# Altium PCB PCBV0.1_2020-06-08_12-09-47.pcbdoc
Units mm, origin at the board's own origin, x right, y up, seen from the top; angles counter-clockwise.
Board outline 146.19 x 149.41 mm, 2 copper layers (Top Layer, Bottom Layer); 7 components, 4 nets, 170 pads, 18 vias.
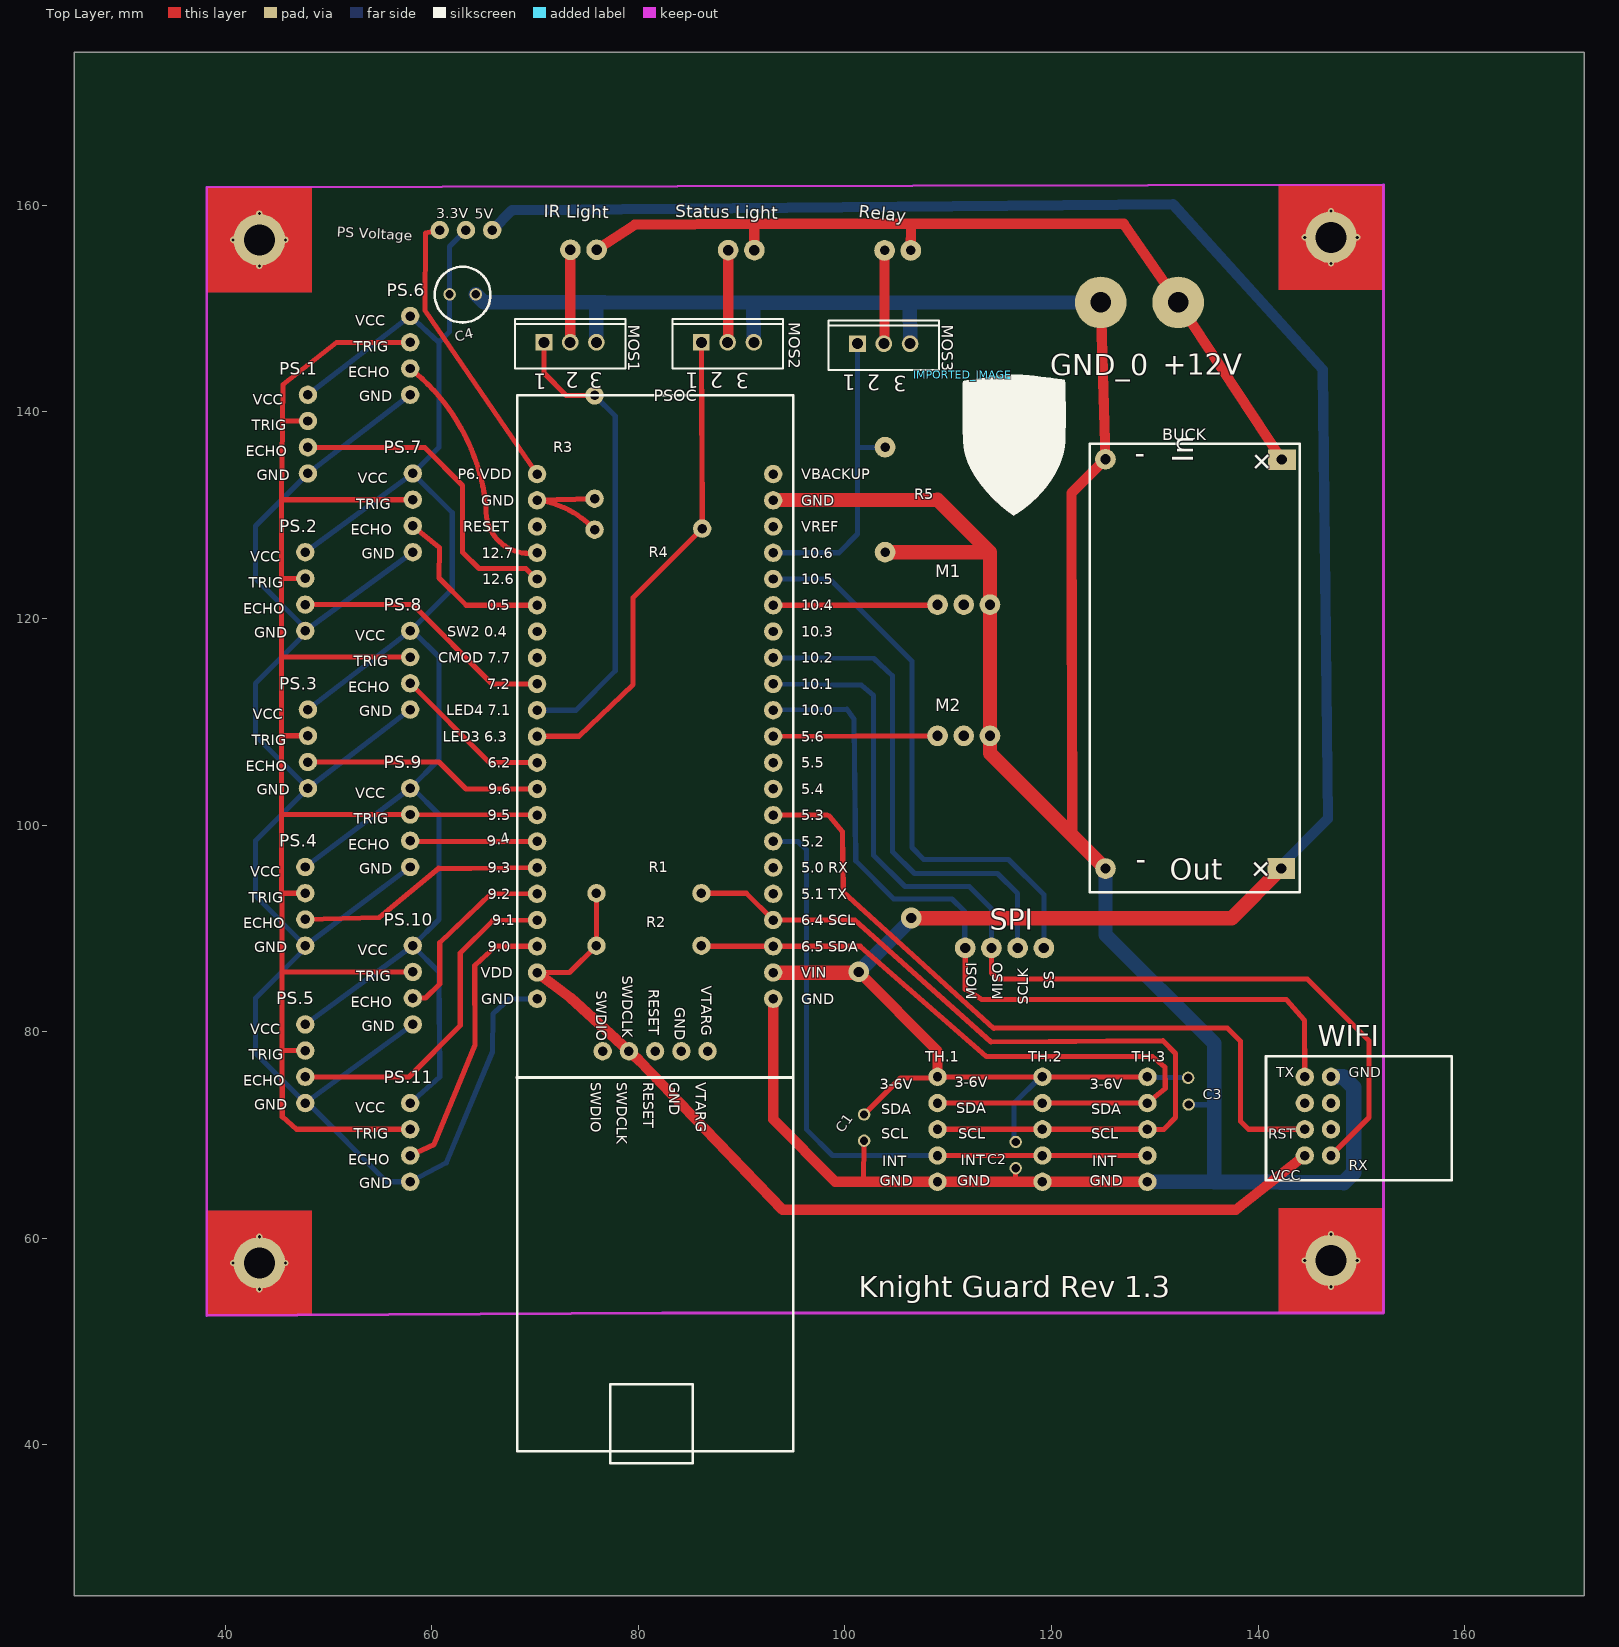
[diagram p0: Top Layer view]
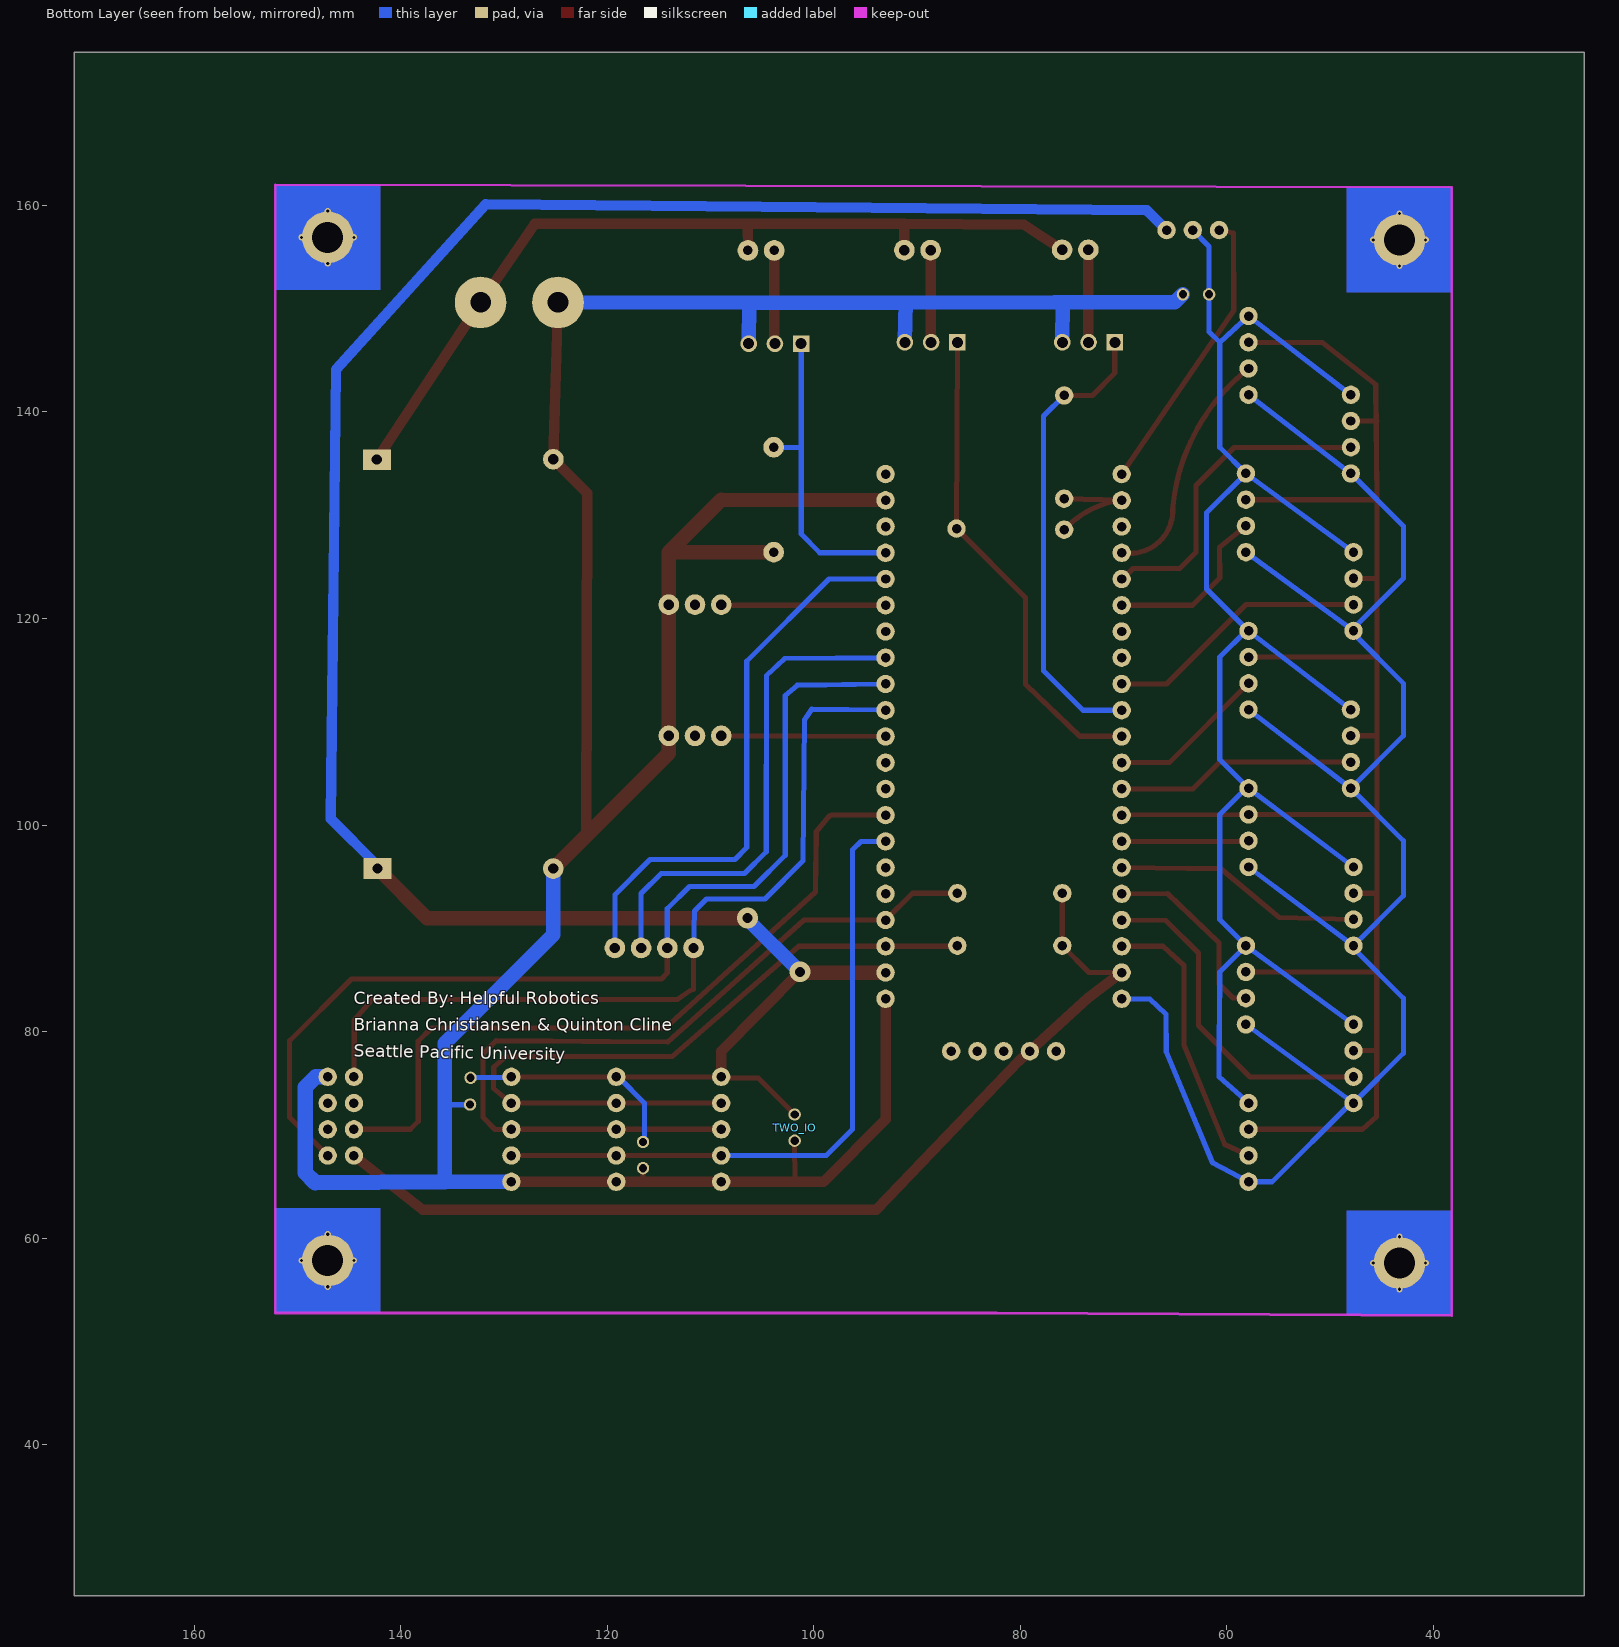
[diagram p1: Bottom Layer view, seen from below]

## Layer stack, top to bottom
Top Layer: signal copper (thickness not stored)
Dielectric: dielectric 0.32, FR-4, Dk 4.8
Bottom Layer: signal copper (thickness not stored)

## Board outline
171.593,25.4 25.4,25.4 25.4,174.812 171.593,174.812

## Components (designator, comment, footprint, x,y, rotation, side; value= is the part's Value field where it differs from the comment)
BUCK "LM2596-MODULE" LM2596-MODULE 133.766,115.605 r270 top
IMPORTED_IMAGE "IMPORTED_IMAGE" IMPORTED_IMAGE 111.402,143.617 r0 top
MOS1 "TO-220AB" TO-220AB 73.406,146.745 r270 top
MOS2 "TO-220AB" TO-220AB 88.646,146.745 r270 top
MOS3 "TO-220AB" TO-220AB 103.766,146.605 r270 top
PSOC "CY8CPROTO-063-BLE" CY8CPROTO-063-BLE 68.266,141.605 r0 top
TWO_IO "TWO_IO" TWO_IO 97.58,71.51 r90 bottom

## Footprints (in the part's own frame and the unit in brackets; to place one, negate y for a bottom-side part, rotate by r counter-clockwise, add the part's x,y. Pads: shape width x height; smd on the part's side, far side on the other; paste and mask are expansions set on the pad)
CY8CPROTO-063-BLE [mil]
  round 70 hole 36: 1(75.98,-300) 2(75.98,-400) 3(75.98,-500) 4(75.98,-600) 5(75.98,-700) 6(75.98,-800) 7(75.98,-900) 8(75.98,-1000) 9(75.98,-1100) 10(75.98,-1200) 11(75.98,-1300) 12(75.98,-1400) 13(75.98,-1500) 14(75.98,-1600) 15(75.98,-1700) 16(75.98,-1800) 17(75.98,-1900) 18(75.98,-2000) 19(75.98,-2100) 20(75.98,-2200) 21(75.98,-2300) 22(975.98,-300) 23(975.99,-400) 24(975.99,-500) 25(975.99,-600) 26(975.99,-700) 27(975.99,-800) 28(975.99,-900) 29(975.99,-1000) 30(975.99,-1100) 31(975.99,-1200) 32(975.99,-1300) 33(975.99,-1400) 34(975.99,-1500) 35(975.99,-1600) 36(975.99,-1700) 37(975.99,-1800) 38(975.99,-1900) 39(975.99,-2000) 40(975.99,-2100) 41(975.99,-2200) 42(975.99,-2300) 43(325.98,-2500) 44(425.98,-2500) 45(525.98,-2500) 46(625.98,-2500) 47(725.98,-2500)
  silkscreen extent -1,-4070 1052,0
IMPORTED_IMAGE [mm]
  silkscreen extent -0.01,-13.64 9.96,0
LM2596-MODULE [mm]
  rect 2x2.7 hole 1: 1(-19.784,8.54) 3(19.814,8.481)
  round 2 hole 1: 2(-19.815,-8.54) 4(19.815,-8.535)
  silkscreen extent -21.33,-10.06 22.1,10.26
TO-220AB [mil]
  rect 63.5x63.5 hole 42: 1(0,-100)
  round 63.5 hole 42: 2(0,0) 3(0,100)
  silkscreen extent -89,-211 100,211
TWO_IO [mm]
  round 1.199 hole 0.798: P$1(0.47,4.28) P$2(-2.07,4.28)

## Free pads (board coordinates)
  round 1.778 hole 0.914: 1(47.752,80.705) 1(47.752,95.945) 1(47.752,126.425) 1(48.006,111.185) 1(48.006,141.665) 1(57.912,73.085) 1(57.912,103.565) 1(57.912,118.805) 1(57.912,149.285) 1(58.166,88.325) 1(58.166,134.045) 1(60.766,157.605) 1(63.306,157.605) 1(65.846,157.605) 1(108.966,73.085) 1(108.966,75.625) 1(119.126,73.085) 1(119.126,75.625) 1(129.286,73.085) 1(129.286,75.625) 2(47.752,78.165) 2(47.752,93.405) 2(47.752,123.885) 2(48.006,108.645) 2(48.006,139.125) 2(57.912,70.545) 2(57.912,101.025) 2(57.912,116.265) 2(57.912,146.745) 2(58.166,85.785) 2(58.166,131.505) 2(108.966,70.545) 2(119.126,70.545) 2(129.286,70.545) 3(47.752,75.625) 3(47.752,90.865) 3(47.752,121.345) 3(48.006,106.105) 3(48.006,136.585) 3(57.912,68.005) 3(57.912,98.485) 3(57.912,113.725) 3(57.912,144.205) 3(58.166,83.245) 3(58.166,128.965) 3(108.966,68.005) 3(119.126,68.005) 3(129.286,68.005) 4(47.752,73.085) 4(47.752,88.325) 4(47.752,118.805) 4(48.006,103.565) 4(48.006,134.045) 4(57.912,65.465) 4(57.912,95.945) 4(57.912,111.185) 4(57.912,141.665) 4(58.166,80.705) 4(58.166,126.425) 4(108.966,65.465) 4(119.126,65.465) 4(129.286,65.465) 39(144.526,68.005) 39(144.526,70.545) 39(144.526,73.085) 39(144.526,75.625) 39(147.066,68.005) 39(147.066,70.545) 39(147.066,73.085) 39(147.066,75.625) 40(75.766,128.605) 40(75.766,131.605) 40(75.766,141.605) 40(75.946,88.325) 40(75.946,93.405) 40(86.106,88.325) 40(86.106,93.405) 40(86.183,128.708)
  round 5 hole 2: 6(124.766,150.605) 7(132.266,150.605)
  round 5 hole 3: 9(43.306,57.605) 9(43.306,156.665) 9(147.066,57.845) 9(147.066,156.905)
  round 2 hole 1: 11(108.966,121.345) 12(111.506,108.645) 12(111.506,121.345) 12(114.046,121.345) 13(73.423,155.703) 13(88.697,155.669) 13(108.966,108.645) 14(75.963,155.703) 14(91.237,155.669) 14(114.046,108.645) 15(119.266,88.105) 16(116.726,88.105) 17(114.186,88.105) 18(111.646,88.105)
  round 2 hole 0.914: 41(103.839,155.635) 42(106.379,155.635) 43(103.886,136.585) 44(103.886,126.425)
  round 1.199 hole 0.798: P$1(64.269,151.385) P$1(116.539,69.322) P$1(133.237,75.531) P$2(61.729,151.385) P$2(116.539,66.782) P$2(133.284,72.944)

## Via types
v1: diameter 0.61, hole 0.305, Top Layer to Bottom Layer, 16 vias
v2: diameter 2, hole 1, Top Layer to Bottom Layer, 2 vias

## Nets (pads, with @x,y where several pads share a name; then routed paths per layer and width w, separated by ;. In a path a pad name is that pad's centre, name@x,y a point inside that pad or via, vN(x,y) a via of type N, cw(c..) or ccw(c..) an arc to the next point about the centre after c; other vN are vias at no path point)
S$1077: pad.3@47.752,75.625 PSOC.18 | length 32.8
  Top Layer w0.5: pad.3@47.752,75.625 57.785,75.625 62.766,80.606 62.766,87.606 65.907,90.747 PSOC.18
S$1080: pad.3@58.166,83.245 PSOC.16 PSOC.17 | length 18.5
  Top Layer w0.5: pad.3@58.166,83.245 59.406,83.245 60.767,84.604 60.767,88.604 65.766,93.38 PSOC.17
S$3766: BUCK.1 BUCK.2 BUCK.3 BUCK.4 MOS1.1 MOS1.2 MOS1.3 MOS2.1 MOS2.2 MOS2.3 MOS3.1 MOS3.2 MOS3.3 pad.1 pad.2 pad.3@47.752,90.865 pad.3@47.752,121.345 pad.3@48.006,106.105 pad.3@48.006,136.585 pad.3@57.912,68.005 pad.3@57.912,98.485 pad.3@57.912,113.725 pad.3@57.912,144.205 pad.3@58.166,128.965 pad.3@108.966,68.005 pad.3@119.126,68.005 pad.3@129.286,68.005 pad.4 pad.6 pad.7 pad.11 pad.12 pad.13 pad.14 pad.15 pad.16 pad.17 pad.18 pad.39 pad.40 pad.41 pad.42 pad.43 pad.44 pad.P$1 pad.P$2 PSOC.1 PSOC.2 PSOC.3 PSOC.4 PSOC.5 PSOC.6 PSOC.9 PSOC.10 PSOC.11 PSOC.12 PSOC.13 PSOC.14 PSOC.15 PSOC.20 PSOC.21 PSOC.23 PSOC.25 PSOC.26 PSOC.27 PSOC.29 PSOC.30 PSOC.31 PSOC.35 PSOC.36 PSOC.39 PSOC.40 PSOC.41 PSOC.42 PSOC.46 TWO_IO.P$1 TWO_IO.P$2 | length 2258.1
  Top Layer w0.254: pad.3@47.752,121.345 pad.3@48.006,121.091 ; pad.3@57.912,113.725 pad.3@58.166,113.471 ; PSOC.27 93.31,121.285 PSOC.27@93.37,121.345 ; 93.116,108.391 93.37,108.645
  Top Layer w0.5: 45.466,108.645 pad.2@48.006,108.645 ; 45.466,123.885 pad.2@47.752,123.885 ; 45.466,139.125 pad.2@48.006,139.125 ; 45.48,93.405 pad.2@47.752,93.405 ; pad.3@47.701,90.865 54.932,91.049 60.655,95.818 63.795,95.793 70.145,95.885 ; pad.2@47.752,78.165 45.494,78.165 ; pad.3@47.752,121.345 58.166,121.345 65.846,113.665 PSOC.9 ; pad.3@47.986,136.552 59.322,136.552 62.989,132.884 62.989,126.422 64.572,124.84 69.106,124.84 PSOC.5@70.14,123.806 ; pad.3@48.006,106.105 60.706,106.105 63.306,103.505 PSOC.13 ; pad.3@57.912,68.005 60.223,69.072 64.173,78.704 64.16,86.399 66.192,88.272 70.195,88.264 ; pad.2@57.912,70.545 46.921,70.545 45.517,71.764 45.494,78.165 ; pad.3@57.912,98.485 57.972,98.425 PSOC.15 ; pad.3@57.912,113.725 65.592,106.045 PSOC.12 ; pad.2@57.912,116.265 45.466,116.265 ; pad.2@57.912,146.745 50.775,146.72 45.593,142.668 45.466,131.505 ; pad.3@57.917,144.195 cw(c45.832,128.884) 65.267,130.542 ; pad.2@58.166,85.785 45.494,85.785 ; pad.3@58.166,128.965 60.74,126.875 60.706,123.918 63.34,121.284 PSOC.6 ; pad.2@58.166,131.505 45.466,131.505 ; pad.1@60.767,157.606 59.385,157.337 59.347,149.811 PSOC.1 ; 65.255,130.599 ccw(c69.406,130.46) PSOC.4@70.157,126.375 ; PSOC.20 73.346,85.725 75.946,88.325 pad.40@75.946,93.405 ; PSOC.14 57.912,101.025 45.466,101.025 ; PSOC.11@70.195,108.594 74.228,108.594 79.496,113.623 79.496,122.02 pad.40@86.183,128.707 ; PSOC.2 pad.40@75.766,131.604 ; PSOC.2@70.221,131.487 cw(c68.912,122.192) pad.40@75.766,128.605 ; MOS1.1 70.866,143.766 73.027,141.605 pad.40@75.766,141.605 ; pad.40@86.106,88.325 86.166,88.265 PSOC.40 ; pad.40@86.106,93.405 90.456,93.405 PSOC.39 ; MOS2.1 pad.40@86.183,128.708 ; PSOC.40 101.488,88.264 113.706,77.581 129.766,77.606 130.988,76.565 131.016,74.497 129.286,73.085 119.126,73.085 pad.1@108.966,73.085 ; PSOC.39 100.957,90.804 114.148,79.013 130.785,79.12 132.017,77.888 132.017,71.683 130.868,70.535 129.286,70.545 119.126,70.545 pad.2@108.966,70.545 ; PSOC.35 98.265,100.964 98.516,100.855 99.766,99.356 99.835,93.532 114.422,80.324 137.015,80.354 138.303,79.067 138.303,71.317 139.075,70.545 pad.39@144.526,70.545 ; 93.056,108.585 pad.13@108.966,108.645 ; PSOC.27 108.906,121.285 pad.11 ; 101.832,65.465 101.813,65.442 TWO_IO.P$2 ; TWO_IO.P$1@101.907,72.027 105.388,75.508 pad.1@109.057,75.508 ; pad.3@108.966,68.005 119.126,68.005 pad.3@129.286,68.005 ; pad.1@108.966,75.625 119.126,75.625 pad.1@129.286,75.625 ; pad.18 111.646,84.105 112.039,83.936 113.266,83.105 142.766,83.105 144.502,81.087 pad.39@144.526,75.625 ; pad.17 114.186,85.686 114.765,85.104 144.765,85.104 150.752,79.12 150.752,71.691 pad.39@147.066,68.005 ; 116.525,65.546 pad.P$2@116.525,66.722 ; 45.466,101.025 45.494,85.785 ; 45.466,101.025 45.466,116.265 ; 45.466,116.265 45.466,131.505 ; 45.494,78.165 45.494,85.785
  Top Layer w1: PSOC.20@70.221,85.699 73.431,83.286 ; 73.406,83.311 80.094,77.2 93.957,62.76 137.871,62.76 137.947,62.831 pad.39@144.526,68.005 ; MOS1.2 73.423,146.762 pad.13@73.423,155.703 ; pad.14@75.963,155.703 79.66,158.134 91.532,158.209 ; MOS2.2 88.697,146.796 pad.13@88.697,155.669 ; pad.14@91.237,155.669 91.237,158.209 127.017,158.209 pad.7 BUCK.1 ; PSOC.42@93.048,83.184 93.048,71.505 99.057,65.465 pad.4@129.286,65.465 ; v2(101.346,85.785) 108.966,78.089 pad.1@108.966,75.625 ; MOS3.2@103.767,146.605 103.839,146.678 pad.41@103.839,155.635 ; pad.42 106.404,158.15 ; 122.022,98.801 121.933,132.115 BUCK.2 pad.6
  Top Layer w1.4: PSOC.41 101.286,85.725 v2(101.346,85.785) ; PSOC.23 108.966,131.505 114.046,126.425 ; pad.44 114.046,126.425 ; v2(106.426,90.999) 137.454,90.999 BUCK.3 ; BUCK.4 114.046,106.974 114.046,108.645 114.046,121.345 114.046,126.425
  Bottom Layer w0.5: pad.1@47.752,80.705 pad.1@58.166,88.325 ; pad.1@47.752,95.945 pad.1@57.912,103.565 ; pad.1@47.752,126.425 pad.1@58.166,134.045 ; pad.1@48.006,111.185 pad.1@57.912,118.805 ; pad.1@48.006,141.665 57.912,149.285 60.706,146.745 ; pad.1@57.912,73.085 60.766,75.605 60.706,85.785 pad.1@58.166,88.325 ; pad.4@57.912,95.945 pad.4@47.752,88.325 ; pad.4@57.912,111.185 pad.4@48.006,103.565 ; pad.4@57.912,141.665 48.006,134.045 42.926,128.965 42.926,123.885 47.752,119.059 pad.4@47.752,118.805 ; pad.4@58.166,80.705 pad.4@47.752,73.085 ; pad.4@58.166,126.425 pad.4@47.752,118.805 ; pad.P$2@61.789,151.445 pad.P$2@61.729,151.385 ; pad.1@63.306,157.605 61.73,156.029 pad.P$2@61.73,151.385 ; PSOC.21 67.485,83.169 65.913,81.721 65.885,78.063 61.403,67.314 57.912,65.465 55.626,65.465 48.006,73.085 pad.4@47.752,73.085 ; PSOC.10 73.955,111.124 77.766,114.935 77.766,139.605 pad.40@75.766,141.605 ; PSOC.31@93.055,111.134 100.203,111.21 100.889,110.22 101.044,96.542 104.732,92.854 110.381,92.854 111.557,91.678 pad.18 ; PSOC.30 101.618,113.534 102.773,112.526 102.773,97.08 105.806,94.045 112.042,94.045 114.186,91.901 pad.17 ; PSOC.29 102.819,116.138 104.597,114.46 104.61,97.426 106.726,95.313 114.78,95.313 116.726,93.369 pad.16 ; PSOC.26 98.532,123.824 106.492,115.864 106.492,97.817 107.63,96.679 115.849,96.679 119.266,93.265 pad.15 ; PSOC.25 99.421,126.364 101.227,128.17 MOS3.1@101.227,146.605 ; PSOC.36 95.446,98.425 96.266,97.605 96.266,70.545 98.806,68.005 pad.3@108.966,68.005 ; 101.226,136.566 pad.43 ; pad.P$1@116.479,69.261 116.385,69.355 116.385,73.071 118.925,75.611 pad.1@119.066,75.611 ; pad.1@129.32,75.611 129.367,75.564 pad.P$1@133.271,75.564 ; pad.P$2@133.271,72.93 135.743,72.93 ; pad.4@47.752,73.085 42.926,77.911 42.926,83.245 47.752,88.071 pad.4@47.752,88.325 ; pad.4@47.752,88.325 42.926,93.151 42.926,98.485 pad.4@48.006,103.565 ; pad.4@47.752,118.805 47.752,118.551 42.926,113.725 42.926,108.645 pad.4@48.006,103.565 ; pad.1@57.912,103.565 58.166,103.565 60.706,101.025 60.706,90.865 pad.1@58.166,88.325 ; pad.1@57.912,103.565 60.706,106.359 60.706,116.265 58.166,118.805 pad.1@57.912,118.805 ; pad.1@57.912,118.805 61.976,122.869 61.976,130.235 pad.1@58.166,134.045 ; pad.1@58.166,134.045 60.706,136.585 60.706,146.745 ; 60.706,146.745 61.73,147.769 pad.P$2@61.73,151.385
  Bottom Layer w1: pad.1@65.846,157.605 67.766,159.525 ; 67.766,159.496 67.766,159.525 ; BUCK.3 142.247,96.086 146.766,100.605 146.266,144.105 131.766,160.105 67.766,159.525
  Bottom Layer w1.4: pad.P$1@64.27,151.385 65.049,150.606 76.683,150.606 ; MOS1.3 75.921,150.606 91.65,150.579 ; MOS2.3@91.183,146.816 91.11,150.579 106.275,150.579 ; v2(101.346,85.785) 106.426,90.865 v2(106.426,90.999) ; MOS3.3@106.306,146.605 106.275,150.579 ; pad.6 106.275,150.579 ; BUCK.4 125.231,89.388 135.743,78.876 135.743,65.465 pad.4@129.286,65.465
  Bottom Layer w1.5: 135.743,65.465 148.278,65.371 149.266,66.359 149.266,74.604 148.247,75.625 pad.39@147.066,75.625
TWO_IO: 
pads on no net: PSOC.7 PSOC.8 PSOC.19 PSOC.22 PSOC.24 PSOC.28 PSOC.32 PSOC.33 PSOC.34 PSOC.37 PSOC.38 PSOC.43 PSOC.44 PSOC.45 PSOC.47
copper on no net:
  other v1: 43.306,55.065 147.066,55.305 40.766,57.605 45.846,57.605 144.526,57.845 149.606,57.845 43.306,60.145 147.066,60.385 43.306,154.125 147.066,154.365 40.766,156.665 45.846,156.665 144.526,156.905 149.606,156.905 43.306,159.205 147.066,159.445

## Other copper
Top Layer:
  region: 38.226,62.685 38.226,52.525 43.306,52.525 48.386,52.525 48.386,62.685
  region: 141.986,62.925 141.986,52.765 147.066,52.765 152.146,52.765 152.146,62.925
  region: 141.986,161.985 141.986,151.825 147.066,151.825 152.146,151.825 152.146,161.985
  region: 38.226,161.745 38.226,151.585 43.306,151.585 48.386,151.585 48.386,161.745
Bottom Layer:
  region: 38.226,161.745 38.226,151.585 43.306,151.585 48.386,151.585 48.386,161.745
  region: 141.986,62.925 141.986,52.765 147.066,52.765 152.146,52.765 152.146,62.925
  region: 38.226,62.685 38.226,52.525 43.306,52.525 48.386,52.525 48.386,62.685
  region: 38.226,161.745 38.226,151.585 43.306,151.585 48.386,151.585 48.386,161.745
  region: 141.986,161.985 141.986,151.825 147.066,151.825 152.146,151.825 152.146,161.985

## Silkscreen, mask and mechanical layers (free items; w line width, h text height)
Top Overlay:
  circle w0.25: c62.982,151.357 r2.7
  lines w0.254: 140.766,65.605 158.766,65.605 158.766,77.605 140.766,77.605 140.766,65.605
  text "IR Light" at 70.856,158.845 h1.2 r359
  text "Status Light" at 83.556,158.845 h1.2 r359
  text "Relay" at 101.283,158.848 h1.2 r354
  text "3.3V" at 60.419,158.742 h1
  text "5V" at 64.165,158.688 h1
  text "PS Voltage" at 50.807,156.967 h1 r357
  text "PS.6" at 55.626,151.225 h1.2
  text "VCC" at 52.595,148.337 h1.02
  text "C4" at 62.371,146.741 h1 r15
  text "TRIG" at 52.458,145.837 h1.02
  text "PS.1" at 45.212,143.605 h1.2
  text "+12V" at 130.766,143.605 h2
  text "GND_0" at 119.889,143.538 h2
  text "ECHO" at 51.914,143.337 h1.02
  text "GND" at 52.958,141.018 h1.02
  text "VCC" at 42.689,140.717 h1.02
  text "TRIG" at 42.552,138.217 h1.02
  text "R3" at 71.766,136.097 h1.02
  text "PS.7" at 55.372,135.985 h1.2
  text "ECHO" at 42.008,135.717 h1.02
  text "GND" at 43.052,133.398 h1.02
  text "VCC" at 52.849,133.097 h1.02
  text "R5" at 106.693,131.532 h1.02
  text "TRIG" at 52.712,130.597 h1.02
  text "PS.2" at 45.212,128.365 h1.2
  text "ECHO" at 52.168,128.097 h1.02
  text "R4" at 81.026,125.917 h1.02
  text "GND" at 53.212,125.778 h1.02
  text "VCC" at 42.435,125.477 h1.02
  text "M1" at 108.766,124.005 h1.2
  text "TRIG" at 42.298,122.977 h1.02
  text "PS.8" at 55.372,120.745 h1.2
  text "ECHO" at 41.754,120.477 h1.02
  text "GND" at 42.798,118.158 h1.02
  text "VCC" at 52.595,117.857 h1.02
  text "TRIG" at 52.458,115.357 h1.02
  text "PS.3" at 45.212,113.125 h1.2
  text "ECHO" at 51.914,112.857 h1.02
  text "M2" at 108.766,111.005 h1.2
  text "GND" at 52.958,110.538 h1.02
  text "VCC" at 42.689,110.237 h1.02
  text "TRIG" at 42.552,107.737 h1.02
  text "PS.9" at 55.372,105.505 h1.2
  text "ECHO" at 42.008,105.237 h1.02
  text "GND" at 43.052,102.918 h1.02
  text "VCC" at 52.595,102.617 h1.02
  text "TRIG" at 52.458,100.117 h1.02
  text "PS.4" at 45.212,97.885 h1.2
  text "ECHO" at 51.914,97.617 h1.02
  text "R1" at 81.026,95.437 h1.02
  text "GND" at 52.958,95.298 h1.02
  text "VCC" at 42.435,94.997 h1.02
  text "TRIG" at 42.298,92.497 h1.02
  text "PS.10" at 55.372,90.265 h1.2
  text "R2" at 80.766,90.097 h1.02
  text "ECHO" at 41.754,89.997 h1.02
  text "SPI" at 114.046,89.865 h2
  text "GND" at 42.798,87.678 h1.02
  text "VCC" at 52.849,87.377 h1.02
  text "TRIG" at 52.712,84.877 h1.02
  text "SS" at 120.274,84.105 h1.02 r90
  text "MOSI" at 112.774,83.105 h1.02 r90
  text "MISO" at 115.274,83.105 h1.02 r90
  text "PS.5" at 44.958,82.645 h1.2
  text "SCLK" at 117.774,82.605 h1.02 r90
  text "ECHO" at 52.168,82.377 h1.02
  text "GND" at 53.212,80.058 h1.02
  text "VCC" at 42.435,79.757 h1.02
  text "WIFI" at 145.766,78.605 h2
  text "TRIG" at 42.298,77.257 h1.02
  text "TH.1" at 107.766,77.097 h1.02
  text "TH.2" at 117.766,77.097 h1.02
  text "TH.3" at 127.766,77.097 h1.02
  text "TX" at 141.766,75.605 h1
  text "GND" at 148.766,75.605 h1
  text "PS.11" at 55.372,75.025 h1.2
  text "ECHO" at 41.754,74.757 h1.02
  text "3-6V" at 110.621,74.625 h1.02
  text "3-6V" at 103.395,74.423 h1.02
  text "3-6V" at 123.715,74.423 h1.02
  text "C3" at 134.645,73.45 h1
  text "GND" at 42.798,72.438 h1.02
  text "VCC" at 52.595,72.137 h1.02
  text "SDA" at 110.766,72.097 h1.02
  text "SDA" at 103.522,72.01 h1.02
  text "SDA" at 123.842,72.01 h1.02
  text "C1" at 99.767,70.103 h1 r55
  text "TRIG" at 52.458,69.637 h1.02
  text "SCL" at 103.512,69.637 h1.02
  text "SCL" at 110.991,69.637 h1.02
  text "SCL" at 123.832,69.637 h1.02
  text "RST" at 140.983,69.644 h1
  text "C2" at 113.765,67.186 h1
  text "ECHO" at 51.914,67.137 h1.02
  text "INT" at 111.205,67.083 h1.02
  text "INT" at 103.632,66.989 h1.02
  text "INT" at 123.952,66.989 h1.02
  text "RX" at 148.766,66.605 h1
  text "VCC" at 141.266,65.605 h1
  text "GND" at 103.378,65.084 h1.02
  text "GND" at 110.857,65.084 h1.02
  text "GND" at 123.698,65.084 h1.02
  text "GND" at 52.958,64.818 h1.02
  text "Knight Guard Rev 1.3" at 101.346,54.289 h2.03
Bottom Overlay:
  text "Created By: Helpful Robotics" at 144.526,82.645 h1.2
  text "Brianna Christiansen & Quinton Cline" at 144.526,80.105 h1.2
  text "Seattle Pacific University" at 144.536,77.565 h1.2 r1
Top Solder:
  region: 141.986,161.985 141.986,151.825 147.066,151.825 152.146,151.825 152.146,161.985
  region: 141.986,62.925 141.986,52.765 147.066,52.765 152.146,52.765 152.146,62.925
  region: 38.226,62.685 38.226,52.525 43.306,52.525 48.386,52.525 48.386,62.685
  region: 38.226,161.745 38.226,151.585 43.306,151.585 48.386,151.585 48.386,161.745
  region: 38.226,161.745 38.226,151.585 43.306,151.585 48.386,151.585 48.386,161.745
  region: 141.986,62.925 141.986,52.765 147.066,52.765 152.146,52.765 152.146,62.925
Bottom Solder:
  region: 141.986,161.985 141.986,151.825 147.066,151.825 152.146,151.825 152.146,161.985
  region: 38.226,161.745 38.226,151.585 43.306,151.585 48.386,151.585 48.386,161.745
  region: 141.986,62.925 141.986,52.765 147.066,52.765 152.146,52.765 152.146,62.925
  region: 38.226,62.685 38.226,52.525 43.306,52.525 48.386,52.525 48.386,62.685

## Text inside footprints (layer, text, board x,y; h text height)
BUCK: Top Overlay "+" at 138.797,95.921 h2.03 r315; Top Overlay "+" at 138.909,135.382 h2.03 r315; Top Overlay "-" at 128.047,134.993 h2.03; Top Overlay "-" at 128.167,95.681 h2.03; Top Overlay "In" at 133.712,135.079 h2.03 r90; Top Overlay "Out" at 131.456,94.693 h2.03
MOS1: Top Overlay "1" at 71.116,143.719 h1.5 r180; Top Overlay "2" at 74.236,143.826 h1.5 r180; Top Overlay "3" at 76.556,143.855 h1.5 r180
MOS2: Top Overlay "1" at 85.852,143.787 h1.5 r180; Top Overlay "2" at 88.206,143.821 h1.5 r180; Top Overlay "3" at 90.746,143.787 h1.5 r180
MOS3: Top Overlay "1" at 101.04,143.579 h1.5 r180; Top Overlay "2" at 103.428,143.579 h1.5 r180; Top Overlay "3" at 106.001,143.512 h1.5 r180
PSOC: Top Overlay "P6.VDD" at 62.495,133.477 h1.02; Top Overlay "GND" at 64.794,130.937 h1.02; Top Overlay "RESET" at 63.031,128.397 h1.02; Top Overlay "12.7" at 64.86,125.857 h1.02; Top Overlay "12.6" at 64.906,123.317 h1.02; Top Overlay "0.5" at 65.396,120.777 h1.02; Top Overlay "SW2 0.4" at 61.507,118.237 h1.02; Top Overlay "CMOD 7.7" at 60.646,115.697 h1.02; Top Overlay "7.2" at 65.396,113.157 h1.02; Top Overlay "LED4 7.1" at 61.385,110.617 h1.02; Top Overlay "LED3 6.3" at 61.063,108.077 h1.02; Top Overlay "6.2" at 65.442,105.537 h1.02; Top Overlay "9.6" at 65.487,102.997 h1.02; Top Overlay "9.5" at 65.442,100.457 h1.02; Top Overlay "9.4" at 65.493,97.926 h1.02 r11; Top Overlay "9.3" at 65.442,95.377 h1.02; Top Overlay "9.2" at 65.442,92.837 h1.02; Top Overlay "9.1" at 65.856,90.297 h1.02; Top Overlay "9.0" at 65.442,87.757 h1.02; Top Overlay "VDD" at 64.748,85.217 h1.02; Top Overlay "GND" at 64.794,82.677 h1.02; Top Overlay "VBACKUP" at 95.766,133.477 h1.02; Top Overlay "GND" at 95.766,130.937 h1.02; Top Overlay "VREF" at 95.766,128.397 h1.02; Top Overlay "10.6" at 95.766,125.857 h1.02; Top Overlay "10.5" at 95.766,123.317 h1.02; Top Overlay "10.4" at 95.766,120.777 h1.02; Top Overlay "10.3" at 95.766,118.237 h1.02; Top Overlay "10.2" at 95.766,115.697 h1.02; Top Overlay "10.1" at 95.766,113.157 h1.02; Top Overlay "10.0" at 95.766,110.617 h1.02; Top Overlay "5.6" at 95.766,108.077 h1.02; Top Overlay "5.5" at 95.766,105.537 h1.02; Top Overlay "5.4" at 95.766,102.997 h1.02; Top Overlay "5.3" at 95.766,100.457 h1.02; Top Overlay "5.2" at 95.766,97.917 h1.02; Top Overlay "5.0 RX" at 95.766,95.377 h1.02; Top Overlay "5.1 TX" at 95.766,92.837 h1.02; Top Overlay "6.4 SCL" at 95.766,90.297 h1.02; Top Overlay "6.5 SDA" at 95.766,87.757 h1.02; Top Overlay "VIN" at 95.766,85.217 h1.02; Top Overlay "GND" at 95.766,82.677 h1.02; Top Overlay "SWDIO" at 75.378,75.105 h1.02 r270; Top Overlay "SWDCLK" at 77.918,75.105 h1.02 r270; Top Overlay "RESET" at 80.458,75.105 h1.02 r270; Top Overlay "GND" at 82.998,75.105 h1.02 r270; Top Overlay "VTARG" at 85.538,75.105 h1.02 r270; Top Overlay "SWDIO" at 75.921,83.947 h1.02 r270; Top Overlay "SWDCLK" at 78.461,85.405 h1.02 r270; Top Overlay "RESET" at 81.001,84.13 h1.02 r270; Top Overlay "GND" at 83.541,82.367 h1.02 r270; Top Overlay "VTARG" at 86.081,84.455 h1.02 r270